# Altium PCB Thunderbots.PcbDoc
Units mil, origin at the board's own origin, x right, y up, seen from the top; angles counter-clockwise.
Board outline 2415 x 866.05 mil, 2 copper layers (Top Layer, Bottom Layer); 17 components, 9 nets, 45 pads, 8 vias.
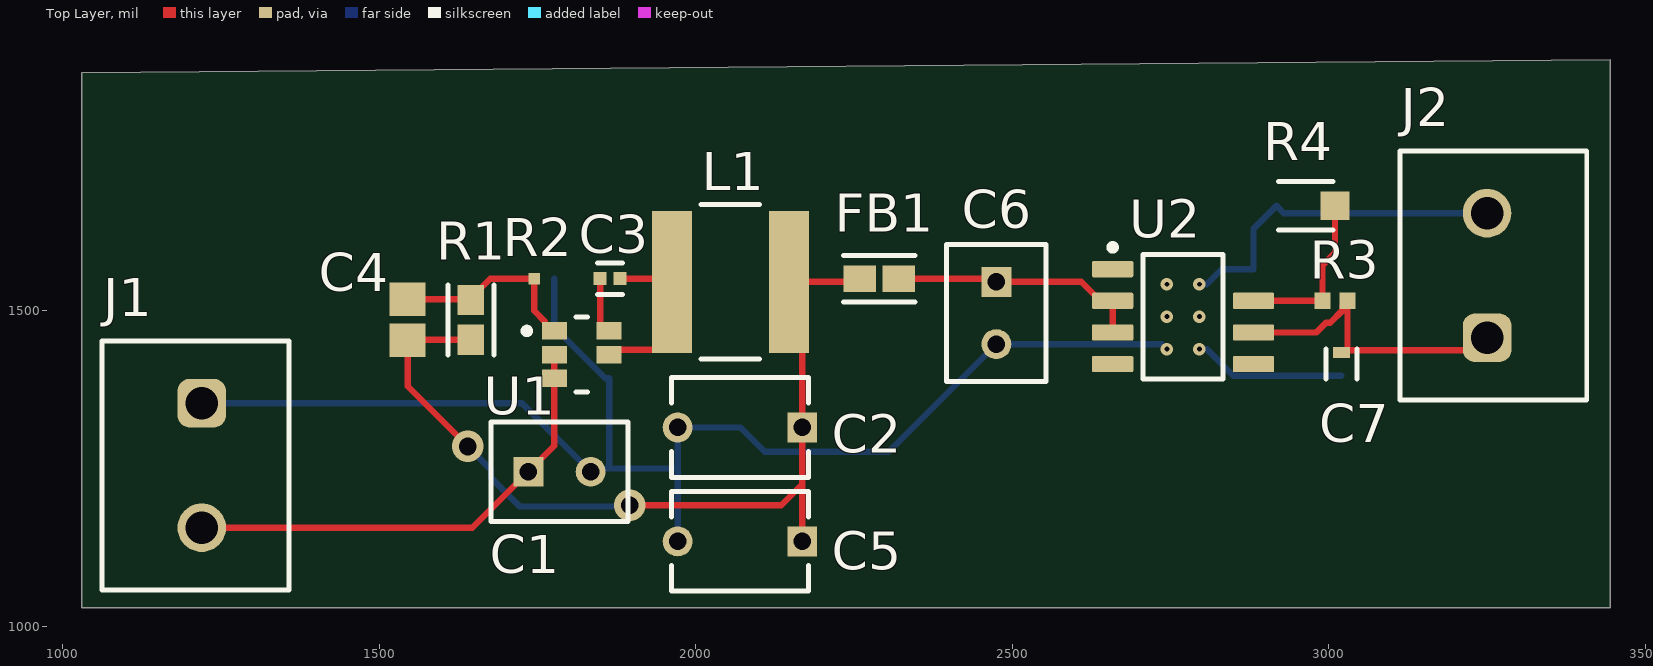
[diagram p0: Top Layer view]
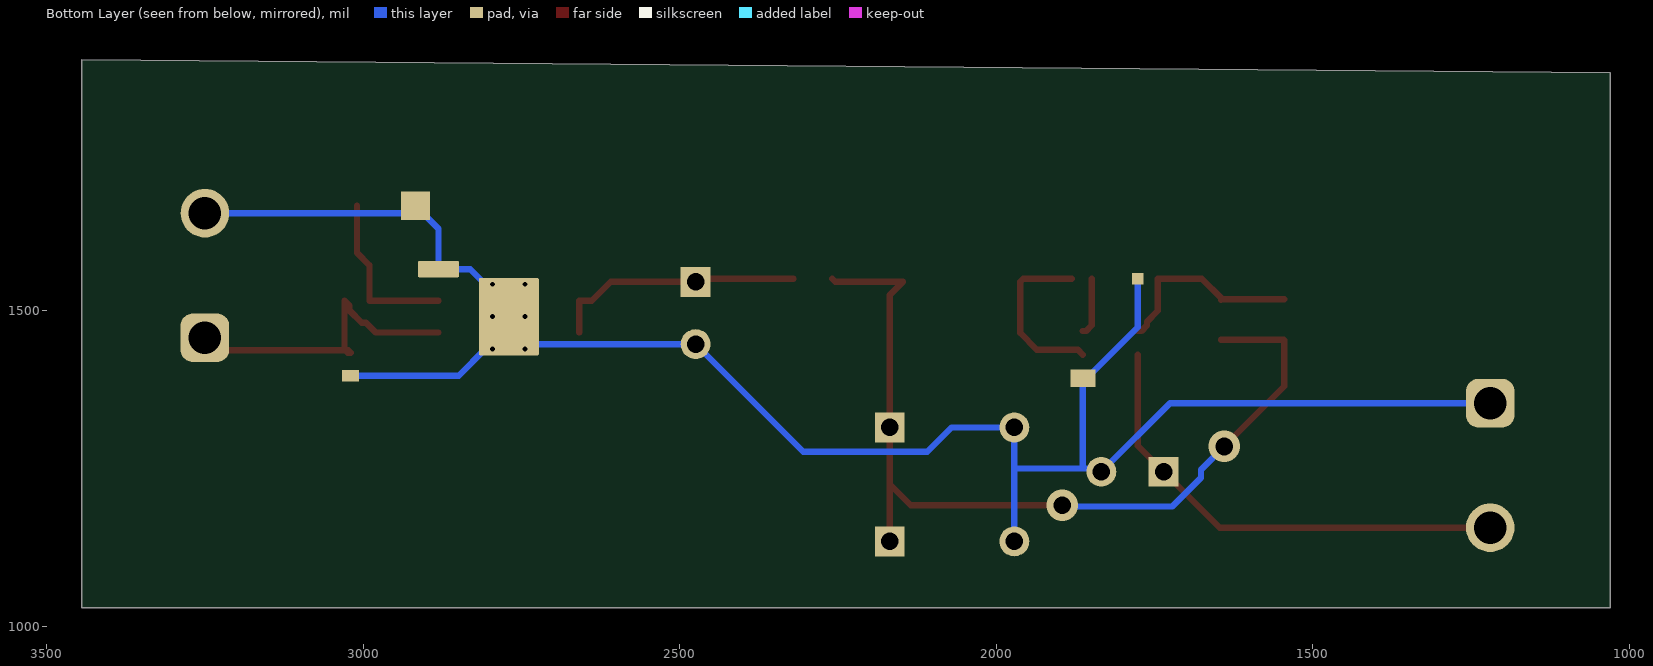
[diagram p1: Bottom Layer view, seen from below]
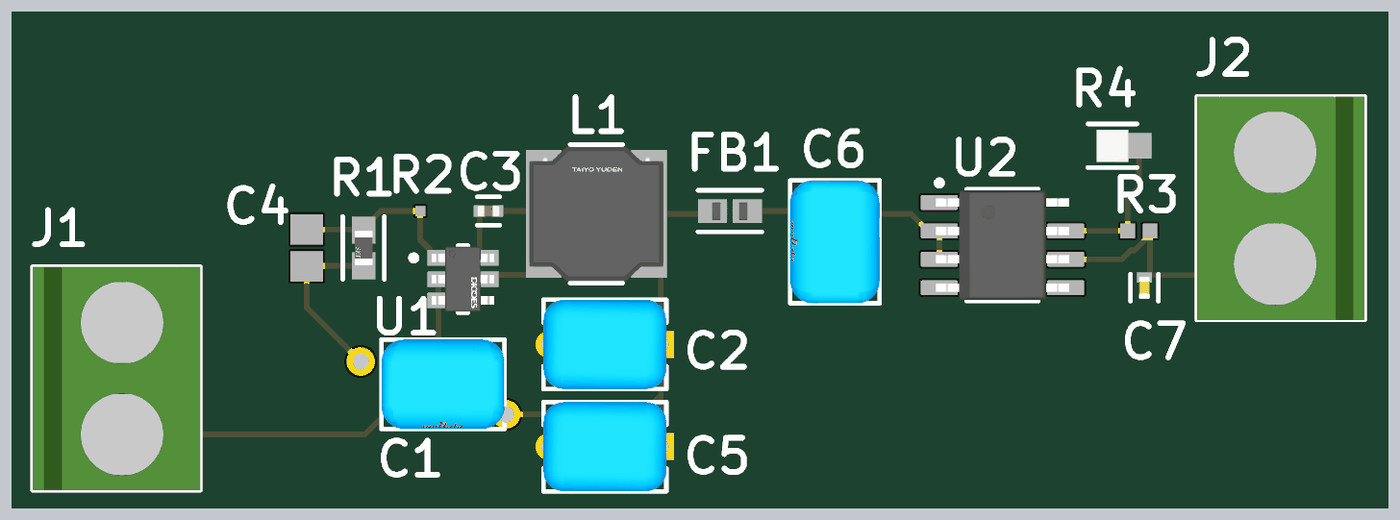
[diagram p2: 3D render of the assembled board from above, using the file's embedded part models]

## Layer stack, top to bottom
Top Solder: solder mask 0.4, Solder Resist, Dk 3.5
Top Layer: signal copper 2.7559
Dielectric 1: dielectric 12.6, FR-4, Dk 4.8
Bottom Layer: signal copper 2.7559
Bottom Solder: solder mask 0.4, Solder Resist, Dk 3.5

## Board outline
1030,1030 1030,1875.47 3445,1896.05 3445,1030

## Design rules (kind name [scope] priority, off if disabled: settings)
Clearance [All] p1: gap=10 ignorepadtopadclearanceinfootprint=FALSE
PolygonConnect [All] p1: connectstyle=Relief reliefconductorwidth=10 reliefentries=4 polygonreliefangle="90 Angle" airgapwidth=10
RoutingVias [All] p1: holewidth=28 width=50 viastyle="Through Hole" minholewidth=28 minwidth=50 maxholewidth=28 maxwidth=50
SolderMaskExpansion [All] p1: expansion=4 istentingtop=FALSE
SupplyNets "Schematic Supply Nets_1" [InNet('GND')] p1: voltage=0.000
Width [All] p1: maxlimit=10 minlimit=10 preferedwidth=10
30 further rules are at their usual default settings.

## Components (designator, comment, footprint, x,y, rotation, side; value= is the part's Value field where it differs from the comment)
C1 "10uF" FP-RDE3P1-MFG 1785,1245 r0 top
C2 "22uF" FP-RDEWK1-MFG 2070,1315 r180 top
C3 "100pF" FP-C0402-BB-MFG 1865,1550 r0 top value="0.10 μF"
C4 "100pF" CAPC2013X127X50NL20T25 1545,1485 r270 top
C5 "22uF" FP-RDEWK1-MFG 2070,1135 r180 top
C6 "10 uF" FP-RDE3P1-MFG 2475,1495.79 r270 top
C7 "10 uF" FP-CL05A106MP5NUNC-MFG 3020,1415 r270 top value=10uF
FB1 "BLM18KG121TN1D" FP-BLM18-0_15-t0_6-d1_2-IPC_A 2290,1550 r0 top
J1 "691137710002" 691137710002 1210,1255 r270 top
J2 "691137710002" 691137710002 3260,1555 r90 top
L1 "10uH" FP-NR6045-MFG 2055,1545 r0 top
R1 "169K" FP-RMCF0603-IPC_A 1645,1485 r270 top
R2 "30K" RESC1005X40X25LL05T05 1760.75,1550 r180 top
R3 "274K" RESC1005X40X25ML05T05 3010,1515 r180 top
R4 "30.1K" FP-ERJ6EN-MFG 2963.74,1665 r0 top
U1 "AP63200WU-7" FP-TSOT26-MFG 1820,1430 r0 top
U2 "TPS7A7001DDAR" DDA0008E_M 2770,1490 r0 top

## Footprints (in the part's own frame and the unit in brackets; to place one, negate y for a bottom-side part, rotate by r counter-clockwise, add the part's x,y. Pads: shape width x height; smd on the part's side, far side on the other; paste and mask are expansions set on the pad)
691137710002 [mm] "Horizontal Cable Entry with Pressure Clamp, pitch 5mm, 02p"
  rrect50% 1.95x1.95 hole 1.3: 1(-2.5,0.25)
  round 1.95 hole 1.3: 2(2.5,0.25)
  silkscreen extent -5,-3.75 5,3.75, body extent -5,-3.75 5,3.75, height 11.6
CAPC2013X127X50NL20T25 [mm] "Chip Capacitor, 2-Leads, Body 2.01x1.25mm, IPC Medium Density"
  rect 1.35x1.45 smd: 1(-0.825,0) 2(0.825,0)
  body extent -1.1,-0.72 1.11,0.72, height 1.27
DDA0008E_M [mm] "SOP, 8-Leads, Body 4x5mm, Pitch 1.27mm, Thermal Pad 2.4x3.1mm, IPC Low Density"
  rrect15% 1.65x0.65 smd: 1(-2.825,1.905) 2(-2.825,0.635) 3(-2.825,-0.635) 4(-2.825,-1.905) 5(2.825,-1.905) 6(2.825,-0.635) 7(2.825,0.635)
  rrect15% 1.65x0.65 smd far side: 8(2.825,1.905)
  rrect4% 2.4x3.1 smd far side: 9(0,0)
  silkscreen extent -2.95,-2.5 1.6,2.9, body extent -2.98,-2.45 2.98,2.45, height 1.5
FP-BLM18-0_15-t0_6-d1_2-IPC_A [mil]
  rect 51.42x41.66 smd paste+0 mask+0: 1(-30.55,0) 2(30.55,0)
  silkscreen extent -56,-37 56,37, body extent -76,-41 76,41, height 10
FP-C0402-BB-MFG [mm]
  rect 0.52x0.52 smd paste+0 mask+0: 1(-0.4,0) 2(0.4,0)
  silkscreen extent -0.5,-0.64 0.5,0.64, body extent -0.8,-0.4 0.8,0.4, height 0.25
FP-CL05A106MP5NUNC-MFG [mm]
  rect 0.45x0.675 smd paste+0 mask+0: 1(-0.463,0)
  rect 0.45x0.675 smd far side paste+0 mask+0: 2(0.463,0)
  silkscreen extent -0.6,-0.63 0.6,0.63, body extent -0.79,-0.45 0.79,0.45, height 0.25
FP-ERJ6EN-MFG [mm]
  rect 1.15x1.15 smd far side paste+0 mask+0: 1(-1.175,0)
  rect 1.15x1.15 smd paste+0 mask+0: 2(1.175,0)
  silkscreen extent -1.1,-0.97 1.1,0.97, body extent -1.85,-0.77 1.85,0.77, height 0.25
FP-NR6045-MFG [mm]
  rect 1.6x5.7 smd paste+0 mask+0: 1(-2.35,0) 2(2.35,0)
  silkscreen extent -1.17,-3.1 1.17,3.1, body extent -3.25,-3.2 3.25,3.2, height 0.25
FP-RDE3P1-MFG [mm]
  rect 1.2x1.2 hole 0.7 paste-2539.97 mask+0: 1(-1.25,0)
  round 1.2 hole 0.7 paste-2539.97 mask+0: 2(1.25,0)
  silkscreen extent -2.75,-2 2.75,2, body extent -2.85,-2.1 2.85,2.1, height 0.25
FP-RDEWK1-MFG [mm]
  rect 1.2x1.2 hole 0.7 paste-2539.97 mask+0: 1(-2.5,0)
  round 1.2 hole 0.7 paste-2539.97 mask+0: 2(2.5,0)
  silkscreen extent -2.75,-2 2.75,2, body extent -3.2,-2.1 3.2,2.1, height 0.25
FP-RMCF0603-IPC_A [mil]
  rect 47.48x41.66 smd paste+0 mask+0: 1(-31.54,0) 2(31.54,0)
  silkscreen extent -55,-37 55,37, body extent -75,-41 75,41, height 10
FP-TSOT26-MFG [mm]
  rect 1x0.7 smd paste+0 mask+0: 1(-1.099,0.95) 2(-1.099,0) 3(-1.099,-0.95) 5(1.099,0) 6(1.099,0.95)
  rect 1x0.7 smd far side paste+0 mask+0: 4(1.099,-0.95)
  silkscreen extent -2.32,-1.5 0.22,1.5, body extent -1.7,-1.6 1.7,1.6, height 0.25
RESC1005X40X25LL05T05 [mm] "Chip Resistor, 2-Leads, Body 1.00x0.50mm, IPC High Density"
  rect 0.45x0.45 smd far side: 1(-0.4,0)
  rect 0.45x0.45 smd: 2(0.4,0)
  body extent -0.53,-0.27 0.53,0.28, height 0.4
RESC1005X40X25ML05T05 [mm] "Chip Resistor, 2-Leads, Body 1.00x0.50mm, IPC Low Density"
  rect 0.65x0.65 smd: 1(-0.5,0) 2(0.5,0)
  body extent -0.53,-0.27 0.53,0.28, height 0.4

## Part data
C1: library part CMP-06035-028282-1, "Ceramic Capacitor 10uF ±10% 50V X7S Radial", Case/Package=Radial, Dielectric=X7S, Max Operating Temperature=125°C, Min Operating Temperature=-55°C, Package Quantity=1500, Resistor Type=Ceramic, Tolerance=10%, Voltage Rating=50V, Capacitance=10uF, Height=5mm, Height - Seated (Max)=0.295inch, Lead Diameter=0.5mm, Lead Pitch=0.098inch, Lead/Base Style=Kinked, Length=0.217inch, Mount="Through Hole", Packaging="Tape and Reel", Termination=Radial, Voltage Rating (DC)=50V, Width=0.157inch
C2 C5: library part CMP-06035-003638-1, "CAP CER 22UF 50V X7S RADIAL", Case/Package=Radial, Max Operating Temperature=125°C, Min Operating Temperature=-55°C, Tolerance=20%, Voltage Rating=50V, Capacitance=22uF, Lead/Base Style="Formed Leads", Mount="Through Hole", Packaging=Bulk
C3: library part CMP-2008-03086-2, "CAP CER 0.1UF 10V X7R 0402", Capacitance="0.10 μF", Manufacturer=Kemet, Manufacturer Part Number=C0402C104K8RACTU, Package=C0402-BB, Temperature="-55°C to +125°C", Temperature Characteristic=X7R, Temperature Coefficient=15%, Temperature Range High=+125°C, Temperature Range Low=-55°C, Tolerance=0.1, Voltage Rating="10 V", Automotive=No, Category=Cap, ComponentLink2Description=Datasheet, ComponentLink2URL=https://content.kemet.com/datasheets/KEM_C1002_X7R_SMD.pdf, Device Class L1="Passive Components", Device Class L2=Capacitors, Device Class L3="Ceramic Capacitors", Digikey Description="CAP CER 0.1UF 10V X7R 0402", Height=0.55mm, Ipc Land Pattern Name=CAPC10050X50, Lead Free=Yes, Material=Ceramic, Mouser Description="Multilayer Ceramic Capacitors MLCC - SMD/SMT 10volts 0.1uF X7R 10%", Octopart=https://octopart.com/c0402c104k8ractu-kemet-106349, RoHS=TRUE
C4: library part CMP-2007-04832-1, Manufacturer="AVX Interconnect / Elco", Part Number=08052C101KAT2A
C6: library part CMP-06035-028282-1, "Ceramic Capacitor 10uF ±10% 50V X7S Radial", Capacitance=10uF, Case/Package=Radial, Dielectric=X7S, Max Operating Temperature=125°C, Min Operating Temperature=-55°C, Package Quantity=1500, Resistor Type=Ceramic, Tolerance=10%, Voltage Rating=50V, Height=5mm, Height - Seated (Max)=0.295inch, Lead Diameter=0.5mm, Lead Pitch=0.098inch, Lead/Base Style=Kinked, Length=0.217inch, Mount="Through Hole", Packaging="Tape and Reel", Termination=Radial, Voltage Rating (DC)=50V, Width=0.157inch
C7: library part CMP-13271-000002-1, "CAP CER 10UF 10V X5R 0402", Capacitance=10uF, Manufacturer=Samsung, Manufacturer Part Number=CL05A106MP5NUNC, Temperature="-55°C to +85°C", Temperature Characteristic=X5R, Temperature Coefficient=15%, Temperature Range High=+85°C, Temperature Range Low=-55°C, Tolerance=20%, Voltage Rating=10V, Automotive=No, Category=Cap, ComponentLink2Description=Datasheet, ComponentLink2URL=http://www.samsungsem.com/kr/support/product-search/mlcc/__icsFiles/afieldfile/2019/05/10/19-CL05A106MP5NUNC.pdf, Device Class L1="Passive Components", Device Class L2=Capacitors, Device Class L3="Ceramic Capacitors", Digikey Description="CAP CER 10UF 10V X5R 0402", Height=0.7mm, Ipc Land Pattern Name=CAPC10050X50, Lead Free=Yes, Material=Ceramic, Octopart=https://octopart.com/cl05a106mp5nunc-samsung-22457395, Package=CL05A106MP5NUNC, RoHS=TRUE
FB1: library part CMP-0686-00554-8, "FERRITE BEAD 120 OHM 0603 1LN", Case Code (Imperial)=0603, Case Code (Metric)=1608, Current Rating=3A, DC Resistance (DCR)=30mR, Inductor Type="FERRITE BEAD", Max Operating Temperature=125°C, Min Operating Temperature=-55°C, Package Quantity=4000, Test Frequency=100MHz, Tolerance=25%, Case/Package=0603, Core Material=Ferrite, Depth=0.95mm, Height=0.8mm, Impedance=120R, Lead Free="Lead Free", Length=1.6mm, Material=Ferrite, Max Current Rating=3A, Max DC Current=3A, Number of Circuits=1, Number of Lines=1, Number of Pins=2, Packaging="Tape and Reel", REACH SVHC="No SVHC", RoHS Compliant=Yes, Series=BLM18K, Termination=SMD/SMT, Width=0.8mm
J1 J2: library part CMP-1502-03324-2, Current Rating=16A, Max Operating Temperature=120°C, Min Operating Temperature=-30°C, Voltage Rating=300V, Contact Material="Nickel, Tin", Height=11.6mm, Lead Pitch=5mm, NexarPartId=78871135, Number of Contacts=2, Number of Pins=2, Number of Rows=1, Packaging=Box, RoHS=Non-Compliant
L1: library part CMP-14484-001000-1, "Shielded Wirewound Inductor 10uH 20% 2.5A 61.1mΩ SMD", Case/Package=2424, Current Rating=2.5A, DC Resistance (DCR)=61.1mR, Inductance Tolerance=20%, Max Operating Temperature=120°C, Min Operating Temperature=-25°C, Package Quantity=1500, Resistor Type=Wirewound, Saturation Current=3A, Self Resonant Frequency=12MHz, Test Frequency=100kHz, Core Material=Ferrite, Halogen Free="Halogen Free", Height=4.5mm, Height - Seated (Max)=0.177inch, Inductance=10uH, Length=0.236inch, Max DC Current=2.5A, Mount="Surface Mount", Number of Pins=2, Packaging="Tape and Reel", RMS Current (Irms)=2.5A, RoHS Compliant=Yes, Series=NR, Shielding=Shielded, Termination=SMD/SMT, Tolerance=20%, Width=6mm
R1: library part CMP-26527-003409-1, "169kΩ ±1% 0.1W 0603 Thick Film Chip Resistor AEC-Q200 compliant", Case Code (Imperial)=0603, Case Code (Metric)=1608, Max Operating Temperature=155°C, Max Power Dissipation=100mW, Min Operating Temperature=-55°C, Resistance=169kR, Resistor Type="Thick Film", Temperature Coefficient=100ppm/°C, Tolerance=1%, Case/Package=0603, Contact Plating=Tin, Features="Automotive AEC-Q200", Height=0.022inch, Lead Free="Lead Free", Length=0.061inch, Mount="Surface Mount", Number of Terminations=2, Packaging="Tape and Reel", Power Rating=100mW, Radiation Hardening=No, RoHS Compliant=Yes, Series=RMCF, Size Code=0603, Width=0.031inch
R2: library part CMP-1011-00675-2, Manufacturer="Vishay Dale", Part Number=CRCW040230K0FKED
R3: library part CMP-2002-00829-1, Manufacturer=Panasonic, Part Number=ERJ-2RKF2743X
R4: library part CMP-2001-00114-2, Case Code (Imperial)=0805, Case Code (Metric)=2012, Max Operating Temperature=155°C, Max Power Dissipation=125mW, Min Operating Temperature=-55°C, Resistance=30.1kΩ, Temperature Coefficient=100ppm/°C, Tolerance=1%, Voltage Rating=150V, Case/Package=0805, Composition="Thick Film", Contact Plating=Tin, Depth=1.25mm, Features="Automotive AEC-Q200", Height=600µm, Lead Free="Lead Free", Length=2mm, Lifecycle Status=Production, Military Standard=Not, Mount="Surface Mount", NexarPartId=55405038, Number of Terminations=2, Packaging="Cut Tape (CT)", Power Rating=125mW, Radiation Hardening=No, REACH SVHC="No SVHC", RoHS=Compliant, Schedule B="8533210045, 8533210045", Termination=SMD/SMT, Voltage Rating (DC)=150V, Width=1.2446mm
U1: library part CMP-12757-000010-1, "IC REG BUCK ADJUSTABLE 2A TSOT26", Ambient Temperature Range High=+85°C, Ambient Temperature Range Low=-40°C, Manufacturer="Diodes Inc.", Max Junction Temp=+160°C, Max Supply Voltage=32V, Min Supply Voltage=3.8V, Nominal Supply Current=22uA, Output Current=2A, Package=TSOT26, Switching Frequency=500kHz, Temperature="-40°C to +85°C", Automotive=No, Category=IC, ComponentLink2Description=Datasheet, ComponentLink2URL=https://www.diodes.com/assets/Datasheets/AP63200-AP63201-AP63203-AP63205.pdf, Device Class L1="Integrated Circuits (ICs)", Device Class L2="Power Management ICs", Device Class L3="Voltage Regulators - Switching", Digikey Description="IC REG BUCK ADJUSTABLE 2A TSOT26", Footprint Url=https://www.diodes.com/assets/Package-Files/TSOT26.pdf, Height=1mm, Ipc Land Pattern Name=SOT95P280X100-6, Lead Free=Yes, Manufacturer Part Number=AP63200WU-7, Mouser Description="AP63200 Series 1.2 V 2 A Adjustable Synchronous Buck Converter - TSOT-26", Number Of Outputs=1, Octopart=https://octopart.com/ap63200wu-7-diodes+inc.-98099548, Output Type=AdjustableProgrammable, RoHS=TRUE, Standoff Height=0.01mm, Switching Topology=Buck, Temperature Range High=+85°C, Temperature Range Low=-40°C
U2: library part CMP-0395-00550-2, "Single Output Very Low Input LDO, 2 A, Adjustable 0.9 to 5 V Output, 1.5 to 6.5 V Input, 8-pin SOPowerPAD (DDA), -40 to 125 degC, Green (RoHS & no Sb/Br)", Manufacturer="Texas Instruments", Accuracy(%)=2, Code_JEDEC=MS-012, ComponentLink1Description="Manufacturer URL", ComponentLink1URL=http://www.ti.com/, ComponentLink2Description=Datasheet, ComponentLink2URL=http://www.ti.com/general/docs/lit/getliterature.tsp?genericPartNumber=TPS7A7001&fileType=pdf, ComponentLink3Description="Package Specification", ComponentLink3URL=http://www.ti.com/litv/pdf/mpds092e, DatasheetVersion=SBVS134B, Eco-Plan="Green (RoHS & no Sb/Br)", Iout(Max)(A)=2, Iq(Typ)(mA)=0.01, Mounting Technology="Surface Mount", PackageDescription="8-Pin Plastic Small Outline, Body 3.9 x 4.9 mm, Pitch 1.27 mm", PackageReference=DDA0008E, PackageVersion=4202561/F, PartNumber=TPS7A7001DDAR, SubFamily="Single Channel LDO", Vdo(Typ)(mV)=170, Vin(Max)(V)=6.5, Vin(Min)(V)=1.5, Vout Adj(Max)(V)=5, Vout Adj(Min)(V)=0.9

## Via types
v1: diameter 19.68, hole 7.87, Top Layer to Bottom Layer, tented top, 6 vias
v2: diameter 50, hole 28, Top Layer to Bottom Layer, 2 vias

## Nets (pads, with @x,y where several pads share a name; then routed paths per layer and width w, separated by ;. In a path a pad name is that pad's centre, name@x,y a point inside that pad or via, vN(x,y) a via of type N, cw(c..) or ccw(c..) an arc to the next point about the centre after c; other vN are vias at no path point)
GND: C1.2 C2.2 C5.2 C6.2 C7.2 J1.1 J2.2 R2.1 R4.1 U1.4 U2.8 U2.9 | length 2960.9
  Bottom Layer w10: J1.1 1725.79,1353.43 C1.2 1839.21,1250 1860,1250 ; R2.1 1776.5,1473.48 1857.38,1392.6 U1.4 1863.29,1253.29 1860,1250 ; C5.2 1971.57,1250 ; U2.9@2736.65,1446.57 C6.2 2304.8,1276.38 2109.27,1276.38 2070.65,1315 C2.2 1971.57,1250 ; v1(2795.59,1438.82) 2807.4,1438.82 2849.43,1396.79 C7.2 ; v1(2795.59,1541.18) 2807.4,1541.18 2831.22,1565 U2.8 2881.22,1628.74 R4.1 2929.06,1653.43 J2.2 ; 1860,1250 1971.57,1250
  other v1: 2744.41,1438.82 2744.41,1490 2795.59,1490 2744.41,1541.18
NetC1_1: C1.1 J1.2 U1.2 U1.3 | length 754.5
  Top Layer w10: J1.2 1647.36,1156.57 C1.1 1776.71,1285.93 U1.3 U1.2
NetC2_1: C2.1 C4.2 C5.1 FB1.1 L1.2 R1.2 | length 1432.8
  Top Layer w10: v2(1640,1285) 1545,1380 C4.2 1545.94,1453.46 R1.2 ; v2(1895.99,1191.89) 2135.31,1191.89 2168.43,1225 ; C5.1 2168.43,1225 ; FB1.1 2254.45,1545 L1.2 2168.43,1524.09 C2.1 2168.43,1225
  Bottom Layer w10: v2(1640,1285) 1676.8,1248.2 1676.8,1235.53 1722.33,1190 v2@1900,1190
NetC3_1: C3.1 U1.6 | length 91.5
  Top Layer w10: C3.1 1849.25,1476.18 1858.03,1467.4 U1.6
NetC3_2: C3.2 L1.1 U1.5 | length 277.9
  Top Layer w10: U1.5 1871.08,1437.8 1935.98,1437.8 1962.48,1464.29 L1.1 1957.48,1550 C3.2
NetC4_1: C4.1 R1.1 R2.2 U1.1 | length 315.1
  Top Layer w10: C4.1 1644.06,1517.48 R1.1 1645,1519.45 1675.55,1550 R2.2 1745,1499.11 1762.03,1482.09 1762.03,1476.18 1770.81,1467.4 U1.1
NetC6_1: C6.1 FB1.2 U2.2 U2.3 | length 402.7
  Top Layer w10: FB1.2 2470,1550 C6.1 2609.09,1545 2639.09,1515 U2.2 U2.3
NetC7_1: C7.1 J2.1 R3.1 U2.6 | length 501.8
  Top Layer w10: U2.6 2980.22,1465 2995.72,1480.5 3002.61,1480.5 3021.89,1499.77 3021.89,1507.2 R3.1 3029.68,1438.46 3024.43,1433.21 C7.1 3023.86,1437.07 3230.65,1437.07 J2.1
NetR3_2: R3.2 R4.2 U2.7 | length 267.2
  Top Layer w10: U2.7 R3.2 2990.31,1571.34 3010,1591.02 R4.2
pads on no net: U2.1 U2.4 U2.5

## Silkscreen, mask and mechanical layers (free items; w line width, h text height)
Board Outline:
  the board outline again, w10

## Dimensions
3460,1030 to 3455,1895 on Mechanical 1
1030,1015 to 3445,1020 on Mechanical 1